# Altium PCB Igloo_FPGA_SSB_WiFi_v1.0.PcbDoc
Units mil, origin at the board's own origin, x right, y up, seen from the top; angles counter-clockwise.
Board outline 2000 x 1500 mil, 4 copper layers (Top Layer, GND Plane, Power Plane, Bottom Layer), stack 58.7 mil thick; 101 components, 86 nets, 411 pads, 228 vias.
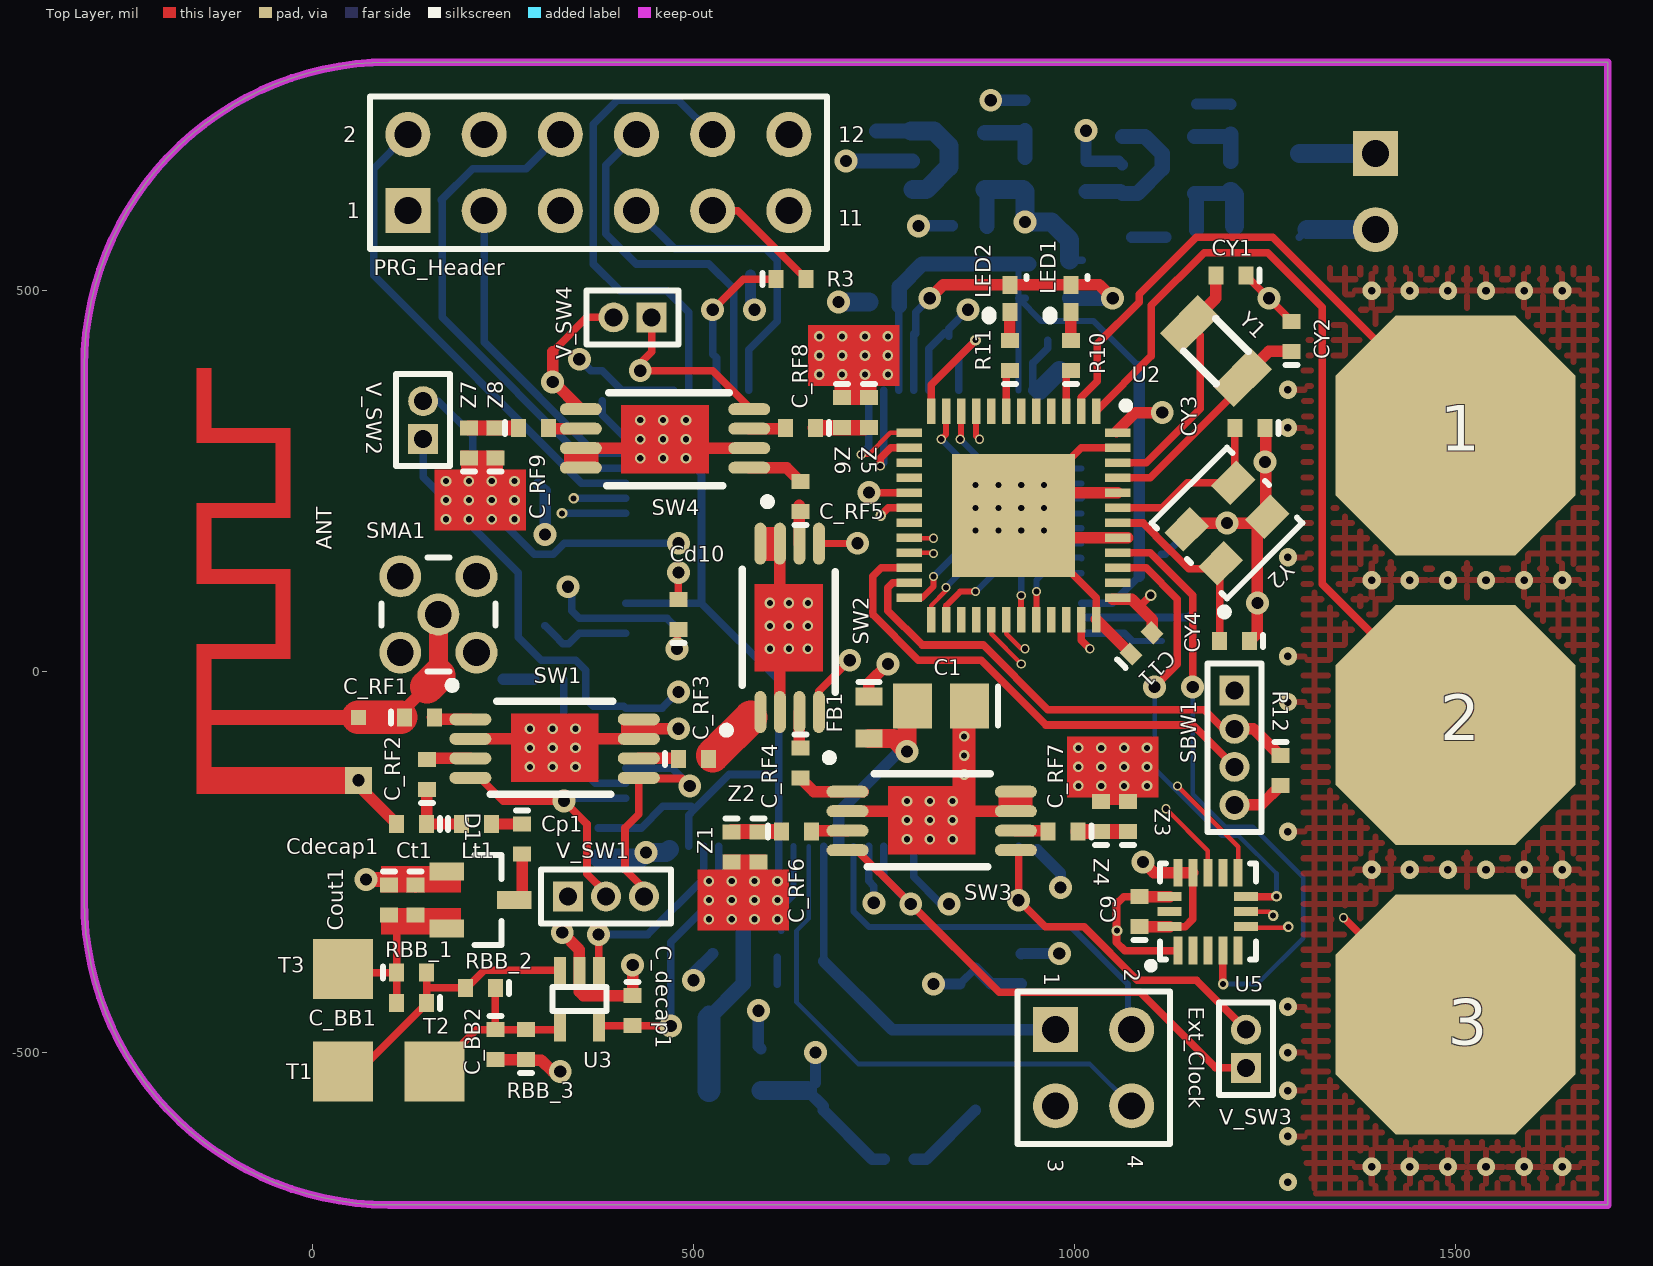
[diagram p0: Top Layer view]
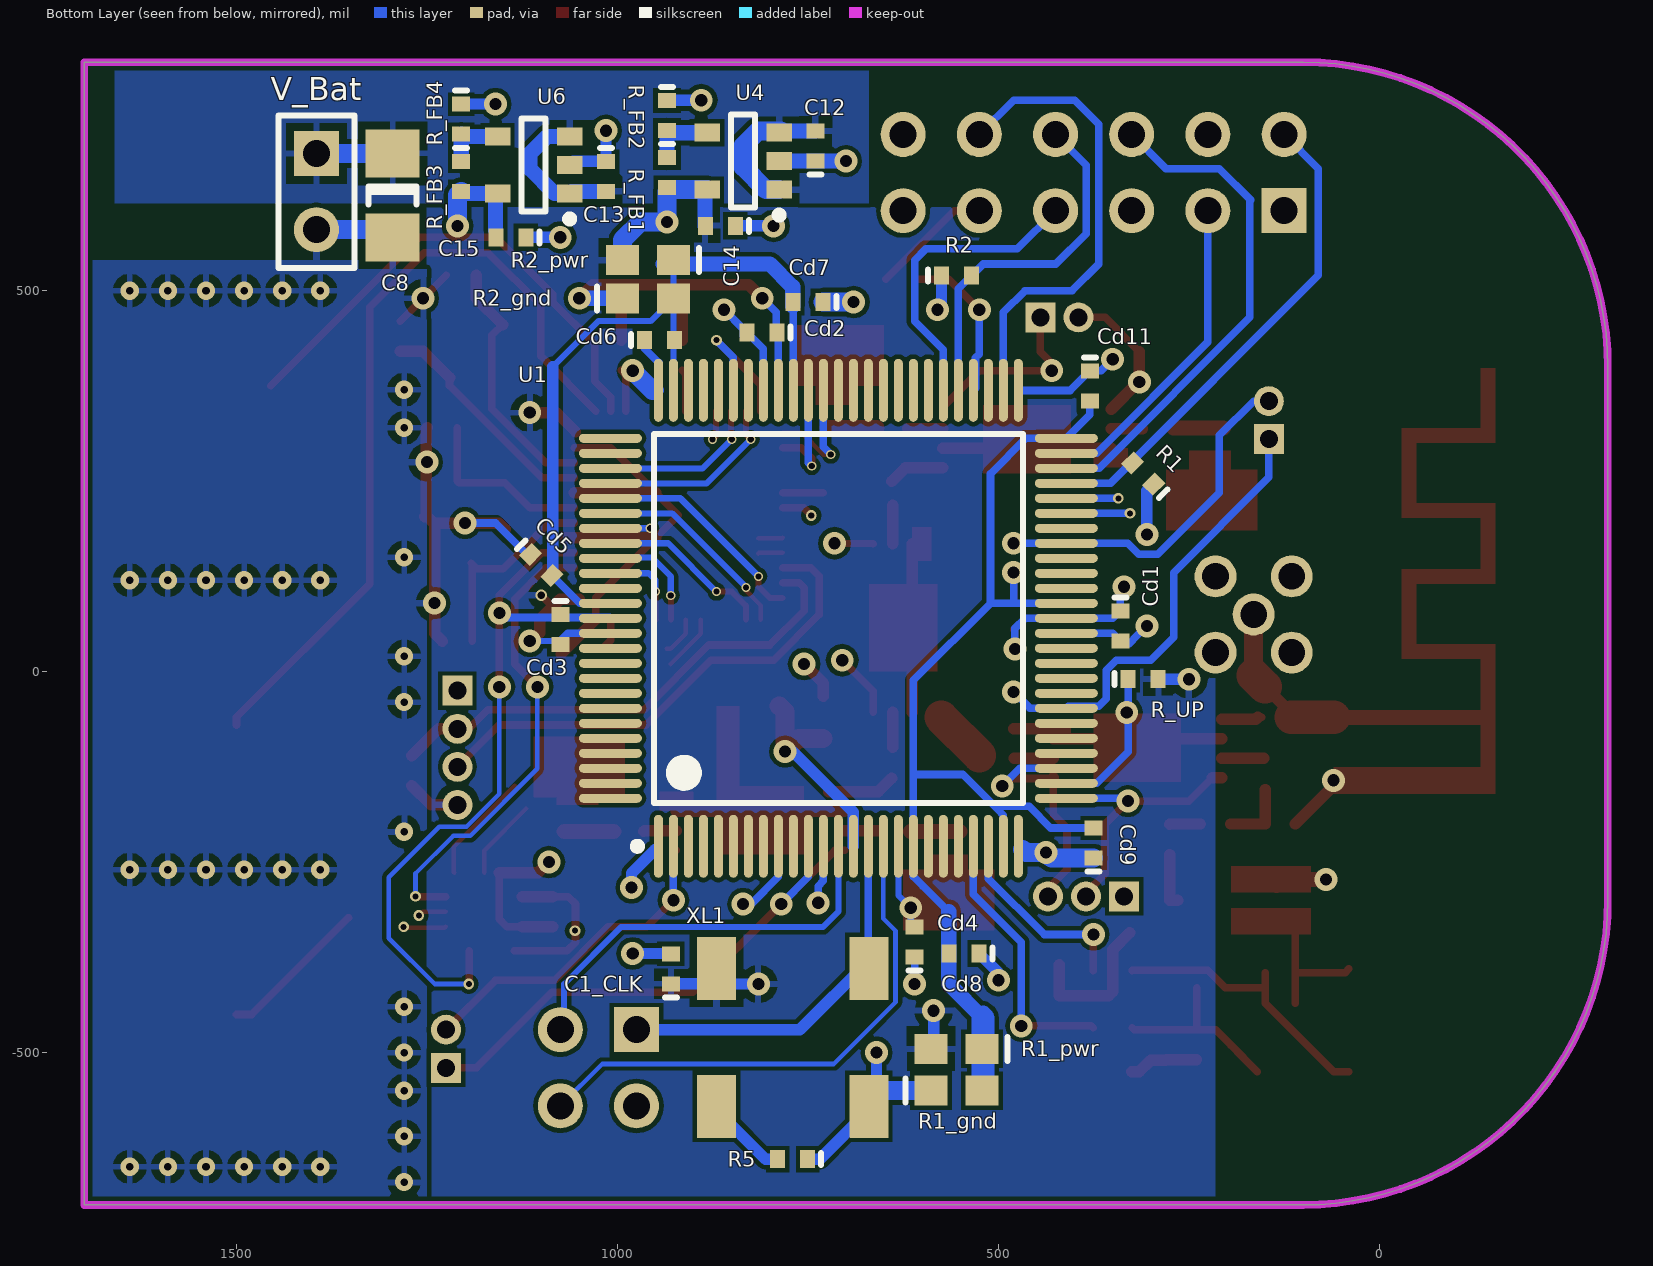
[diagram p1: Bottom Layer view, seen from below]
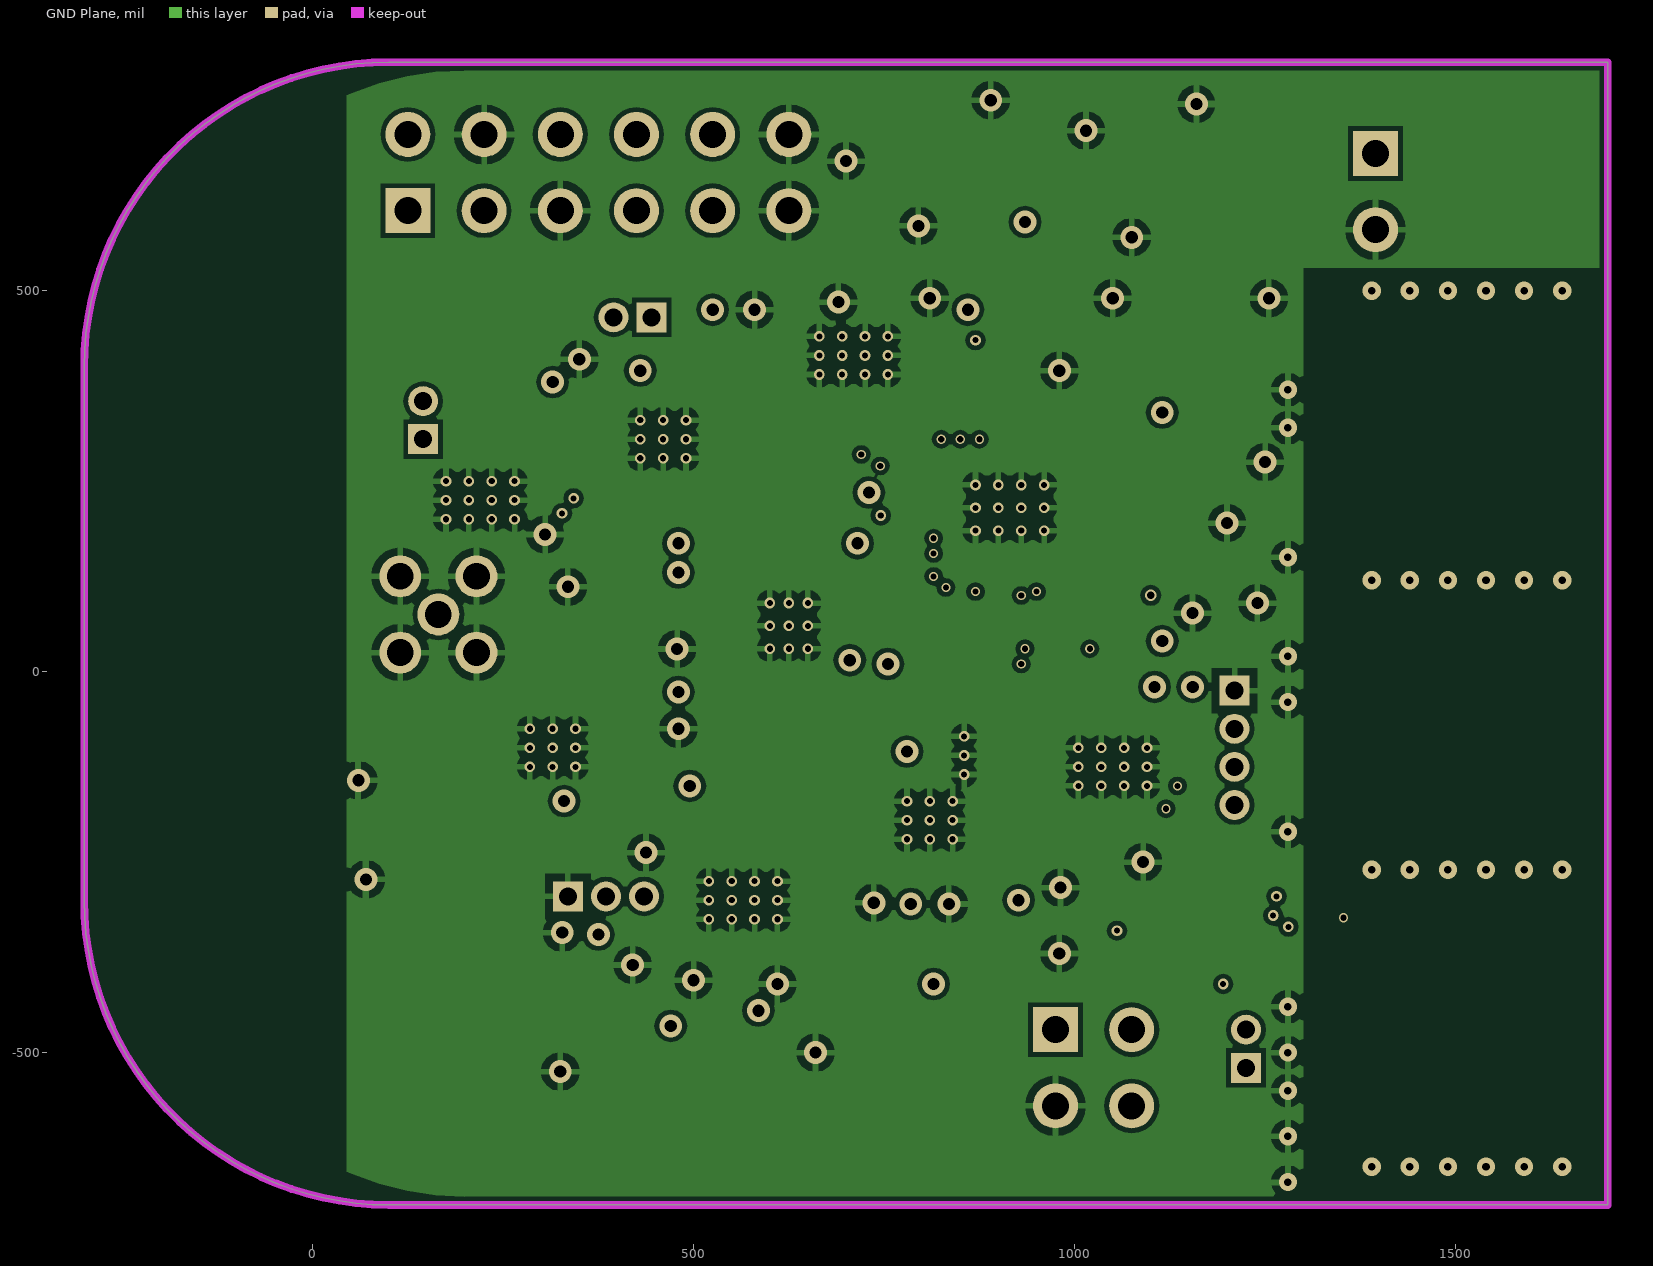
[diagram p2: GND Plane]
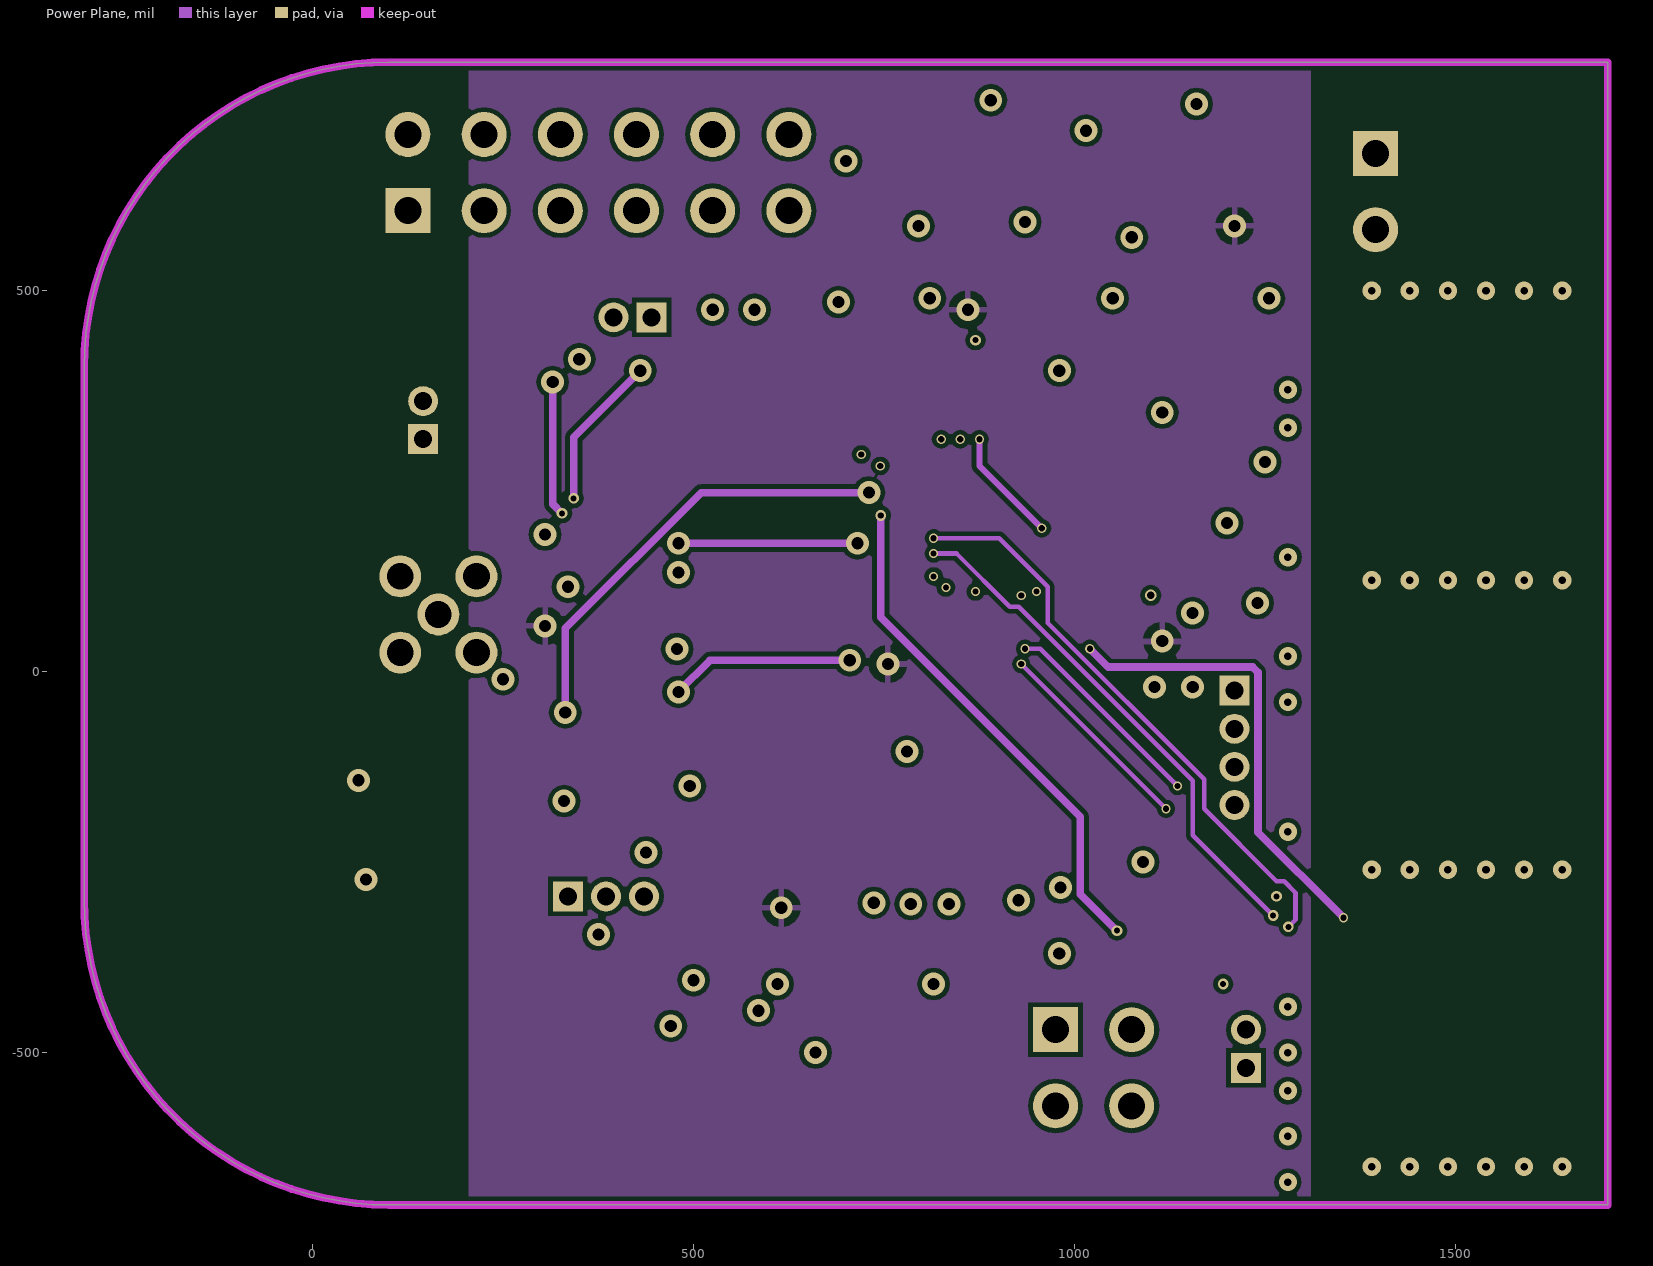
[diagram p3: Power Plane]

## Layer stack, top to bottom
Top Layer: signal copper 0.7
Dielectric: core 20, Rodgers 4350, Dk 3.48
GND Plane: signal copper 1.4
Dielectric: prepreg 14.5, Rodgers 4350, Dk 3.52
Power Plane: signal copper 1.4
Dielectric: core 20, Rodgers 4350, Dk 3.48
Bottom Layer: signal copper 0.7

## Board outline
100,-700 cw(c100,-300) -300,-300 -300,400 cw(c100,400) 100,800 1700,800 1700,-700

## Design rules (kind name [scope] priority, off if disabled: settings)
Clearance Clearance~Sierra [All] p1: gap=6 // Sunstone Circuits Minimum Clearance Rule (MLB~4&6 Layer Designs)
HoleSize "HoleSize~Sierra Circuits" [All] p1: absolutevalues=TRUE maxlimit=251 minlimit=6 maxpercent=80.000 minpercent=20.000 // Sunstone Circuits Hole Size Rule (MLB~4&6 Layer Designs)
HoleSize Testpoint [All] p2: absolutevalues=TRUE maxlimit=100 minlimit=1 maxpercent=80.000 minpercent=20.000
HoleSize TestPointUsage [All] p3: absolutevalues=TRUE maxlimit=100 minlimit=1 maxpercent=80.000 minpercent=20.000
HoleToHoleClearance [All] p1: gap=6 allowstackedmicrovias=TRUE
MinimumAnnularRing "MinimumAnnularRing~Sierra Circuits" [All] p1: minimumring=2 // Sunstone Circuits Minimum Annular Ring (MLB~4&6 Layer Designs)
MinimumSolderMaskSliver [All] p1: minsoldermaskwidth=4
PlaneClearance "PlaneClearance~Sunstone Circuits" [All] p1: clearance=12 // Sunstone Circuits Power Plane Clearance Rule (MLB~4&6 Layer Designs)
PlaneConnect "PlaneConnect~Sunstone Circuits" [All] p1: planeconnectstyle=Relief reliefexpansion=10 reliefentries=4 reliefconductorwidth=8 reliefairgap=10 // Sunstone Circuits Power Plane Connect Rule (MLB~4&6 Layer Designs)
PolygonConnect "PolygonConnect~Sunstone Circuits" [All] p1: connectstyle=Relief reliefconductorwidth=8 reliefentries=4 polygonreliefangle="90 Angle" airgapwidth=10 // Sunstone Circuits Polygon Connect Style (MLB~4&6 Layer Designs)
RoutingVias "RoutingVias~Sierra Circuits" [All] p1: holewidth=16 width=30 viastyle="Through Hole" minholewidth=6 minwidth=10 maxholewidth=20 maxwidth=40 // Sunstone Circuits Routing Vias Rule (MLB~4&6 Layer Designs)
ShortCircuit "ShortCircuit~Sunstone Circuits" [All] p1: allowed=FALSE // Sunstone Circuits Short Circuit Rule~Do Not Allow (MLB~4&6 Layer Designs)
SilkToSilkClearance [All] p1: silktosilkclearance=4
SilkToSolderMaskClearance [IsPad] p1: minsilkscreentomaskgap=4 clearancetoexposedcopper=TRUE
SolderMaskExpansion "SolderMaskExpansion~Sunstone Circuits" [All] p1: expansion=3 // Sunstone Circuits Solder Mask Expansion Rule (MLB~4&6 Layer Designs)
ViasUnderSMD "ViasUnderSMD~Sunstone Circuits" [All] p1: allowed=FALSE // Sunstone Circuits Vias Under SMD~Do Not Allow (MLB~4&6 Layer Designs)
Width "Width~Sierra Circuits" [All] p1: maxlimit=100 minlimit=6 preferedwidth=10 // Sunstone Circuits Minimum Width Rule (MLB~4&6 Layer Designs)
20 further rules are at their usual default settings.

## Classes and differential pairs
component class Top_sheet_Igloo_FPGA_SSB_WiFi_v1.0: C8 C12 C13 C14 C15 R_FB1 R_FB2 R_FB3 R_FB4 R_UP U4 U6 V_Bat
component class U_Sensors_Igloo_FPGA_SSB_WiFi_v1: C9 U5
component class U_RF_sheet_Igloo_FPGA_SSB_WiFi_v1: ANT C_BB1 C_BB2 C_decap1 C_RF1 C_RF2 C_RF3 C_RF4 C_RF5 C_RF6 C_RF7 C_RF8 C_RF9 Cdecap1 Cout1 Cp1 Ct1 D1 Lt1 RBB_1 RBB_2 RBB_3 SMA1 SW1 SW2 SW3 SW4 T1 T2 T3 U3 V_SW1 V_SW2 V_SW3 V_SW4 VIN1 Z1 Z2 Z3 Z4 Z5 Z6 Z7 Z8
component class U_FPGA_sheet_Igloo_FPGA_SSB_WiFi_v1: C1 C1_CLK Cd1 Cd2 Cd3 Cd4 Cd5 Cd6 Cd7 Cd8 Cd9 Cd10 Cd11 Ext_Clock FB1 PRG_Header R1 R1_gnd R1_pwr R2 R2_gnd R2_pwr R3 R5 U1 XL1
component class U_MSP_sheet_Igloo_FPGA_SSB_WiFi_v1: 1 2 3 C11 CY1 CY2 CY3 CY4 LED1 LED2 MSP430 R10 R11 R12 SBW1 U2 Y1 Y2

## Components (designator, comment, footprint, x,y, rotation, side; value= is the part's Value field where it differs from the comment)
1 "Cap touch" CAPTOUCH-8mm#1 1480,310 r90 top
2 "Cap touch" CAPTOUCH-8mm#2 1950,-60 r90 top
3 "Cap touch" CAPTOUCH-8mm#3 1480,-430 r90 top
ANT "ant_PIFA_2.4GHZ" ANT_PIFA_2.4GHz 60,-60 r90 top net-tie
C1 "Cap" 0805-W 825,-45 r180 top
C1_CLK "Cap" 0402 930,-390 r90 bottom
C8 "Cap" 1206-W 1295,625 r270 bottom
C9 "Cap" 0402 1085,-315 r90 top
C11 "Cdecap_MSP" 0402 1087.93,37.07 r45 top
C12 "Cdecap_MSP" 0402 740,690 r90 bottom
C13 "Cdecap_MSP" 0402 1015,650 r270 bottom
C14 "Cdecap_MSP" 0402 865,585 r0 bottom
C15 "Cdecap_MSP" 0402 1140,570 r0 bottom
C_BB1 "Cap" 0402 130,-435 r180 top
C_BB2 "Cap" 0402 240,-489.68 r270 top
C_decap1 "Cap" 0402 420,-445 r270 top
C_RF1 "Cap" 0402 140,-60 r0 top
C_RF2 "Cap" 0402 150,-135 r90 top
C_RF3 "Cap" 0402 500,-115 r0 top
C_RF4 "Cap" 0402 640,-120 r270 top
C_RF5 "Cap" 0402 640,230 r90 top
C_RF6 "Cap" 0402 635,-210 r0 top
C_RF7 "Cap" 0402 985,-210 r180 top
C_RF8 "Cap" 0402 640,320 r180 top
C_RF9 "Cap" 0402 290,320 r0 top
Cd1 "Cdecap_MSP" 0402 340,60 r270 bottom
Cd2 "Cdecap_MSP" 0402 810,445 r0 bottom
Cd3 "Cdecap_MSP" 0402 1075,55 r270 bottom
Cd4 "Cdecap_MSP" 0402 610,-355 r90 bottom
Cd5 "Cdecap_MSP" 0402 1100,140 r225 bottom
Cd6 "Cdecap_MSP" 0402 945,435 r180 bottom
Cd7 "Cdecap_MSP" 0402 750,485 r0 bottom
Cd8 "Cdecap_MSP" 0402 545,-370 r0 bottom
Cd9 "Cdecap_MSP" 0402 375,-225 r90 bottom
Cd10 "Cdecap_MSP" 0402 480,75 r90 top
Cd11 "Cdecap_MSP" 0402 380,375 r270 bottom
Cdecap1 "Cap" 0402 100,-300 r270 top
Cout1 "Cap" 0402 135,-300 r270 top
Cp1 "Cap" 0402 275,-220 r270 top
Ct1 "C_Ant_tune" 0402 130,-200 r180 top
CY1 "C_crystal" 0402 1205,520 r180 top
CY2 "C_crystal" 0402 1285,440 r90 top
CY3 "Cap" 0402 1230,320 r180 top
CY4 "Cap" 0402 1210,40 r180 top
D1 "SMS7630-005" "SOT23 - N" 220,-300 r0 top
Ext_Clock "Clock Port" HDR2X2 975,-470 r270 top
FB1 "Ferrite Bead" 0603 730,-60 r270 top
LED1 "LED" "Diode - 0402" 995,490 r270 top
LED2 "LED" "Diode - 0402" 915,490 r270 top
Lt1 "L_Ant_tune" 0402 215,-200 r0 top
PRG_Header "LCPS Header" HDR2X6 125,605 r0 top
R1 "Res" 0402 310,260 r45 bottom
R1_gnd "Res" 0603-W 555,-550 r180 bottom
R1_pwr "Res" 0603-W 555,-495 r0 bottom
R2 "Res" 0402 555,520 r180 bottom
R2_gnd "Res" 0603-W 960,490 r180 bottom
R2_pwr "Res" 0603-W 960,540 r0 bottom
R3 "Res" 0402 628.03,515 r0 top
R5 "Res" 0402 770,-640 r0 bottom
R10 "Res_LED" 0402 995,415 r90 top
R11 "Res_LED" 0402 915,415 r90 top
R12 "Res_HSS" 0402 1270,-130 r270 top
R_FB1 "Res" 0402 935,655 r270 bottom
R_FB2 "Res" 0402 935,730 r270 bottom
R_FB3 "Res" 0402 1205,650 r270 bottom
R_FB4 "Res" 0402 1205,725 r270 bottom
R_UP "Res" 0402 310,-10 r180 bottom
RBB_1 "Res" 0402 130,-395 r0 top
RBB_2 "Res" 0402 220,-415 r180 top
RBB_3 "Res" 0402 280,-489.68 r90 top
SBW1 "MHDR1X4-angled" MHDR1X4 1210,-25 r270 top
SMA1 "SMA - Hole - 5 Pin" CON-MMCX 165,75 r90 top
SW1 "HMC190BMS8" MSOP_8pin 320,-100 r0 top
SW2 "HMC190BMS8" MSOP_8pin 625,60 r90 top
SW3 "HMC190BMS8" MSOP_8pin 815,-195 r0 top
SW4 "HMC190BMS8" MSOP_8pin 460,305 r180 top
T1 "Test Point SMT" SMT_TESTPOINT_2MM 40,-525 r0 top
T2 "Test Point SMT" SMT_TESTPOINT_2MM 160,-525 r0 top
T3 "Test Point SMT" SMT_TESTPOINT_2MM 40,-390 r0 top
U1 "AGLN060V5-ZVQG100I" VQ100_M 710,70 r90 bottom
U2 "MSP430 Wolverine 48-Pin" MSP_QFN48_RGZ_PAD0 920,205 r270 top
U3 "Comparator" SC70-5 350,-430 r180 top
U4 "TPS78001DDCR" TI-DDC5_L 835,670 r0 bottom
U5 "ADXL362" ADXL362 1175,-315 r90 top
U6 "TPS78001DDCR" TI-DDC5_L 1110,665 r0 bottom
V_Bat "Battery Connector" HDR1X2 1395,680 r270 bottom
V_SW1 "MHDR1X3" MHDR1X3 335,-295 r0 top
V_SW2 "MHDR1X2" MHDR1X2 145,305 r90 top
V_SW3 "MHDR1X2" MHDR1X2 1225,-520 r90 top
V_SW4 "MHDR1X2" MHDR1X2 445,465 r180 top
XL1 "Oscillator" SG-636 770,-480 r180 bottom
Y1 "XTAL" "XTAL [3.20mm x 1.50mm]" 1185.56,420.66 r135 top
Y2 "XTAL" "XTAL 2.5MM X 3.2MM" 1200,195 r45 top
Z1 "Cap" 0402 550,-230 r270 top
Z2 "Cap" 0402 585,-230 r270 top
Z3 "Cap" 0402 1070,-190 r90 top
Z4 "Cap" 0402 1035,-190 r90 top
Z5 "Cap" 0402 730,340 r270 top
Z6 "Cap" 0402 695,340 r270 top
Z7 "Cap" 0402 205,300 r90 top
Z8 "Cap" 0402 240,300 r90 top

## Footprints (in the part's own frame and the unit in brackets; to place one, negate y for a bottom-side part, rotate by r counter-clockwise, add the part's x,y. Pads: shape width x height; smd on the part's side, far side on the other; paste and mask are expansions set on the pad)
0402 [mm] "Surface Mount; Body 1 x 0.5 mm (LxW typ)"
  rect 0.5x0.6 smd: 1(-0.5,0) 2(0.5,0)
  silkscreen extent -0.95,-0.2 -0.95,0.2, body extent -0.5,-0.25 0.5,0.25, height 0.5
0603 [mm] "Surface Mount; Body 1.6 x 0.8 mm (LxW typ)"
  rect 0.6x0.9 smd: 1(-0.7,0) 2(0.7,0)
  silkscreen extent -1.17,-0.35 -1.17,0.35, body extent -0.8,-0.4 0.8,0.4, height 0.8
0603-W [mm] "Surface Mount - Wide; Body 1.6 x 0.8 mm (LxW typ)"
  rect 1.1x1 smd: 1(-0.85,0) 2(0.85,0)
  silkscreen extent -1.7,-0.4 -1.7,0.4, body extent -0.8,-0.4 0.8,0.4, height 0.8
0805-W [mm] "Surface Mount - Wide; Body 2.0 x 1.25 mm (LxW typ)"
  rect 1.3x1.5 smd: 1(-0.95,0) 2(0.95,0)
  silkscreen extent -1.9,-0.65 -1.9,0.65, body extent -1,-0.62 1,0.63, height 1.25
1206-W [mm] "Surface Mount - Wide; Body 3.2 x 1.6 mm (LxW typ)"
  rect 1.6x1.8 smd: 1(-1.4,0) 2(1.4,0)
  silkscreen extent -0.3,-0.8 0.3,0.8, body extent -1.6,-0.8 1.6,0.8, height 1.1
ADXL362 [mm]
  rect 0.925x0.3 smd: 1(-1.3,1) 2(-1.3,0.5) 3(-1.3,0) 4(-1.3,-0.5) 5(-1.3,-1) 9(1.3,-1) 10(1.3,-0.5) 11(1.3,0) 12(1.3,0.5) 13(1.3,1)
  rect 0.3x0.8 smd: 6(-0.5,-1.275) 7(0,-1.275) 8(0.5,-1.275) 14(0.5,1.275) 15(0,1.275) 16(-0.5,1.275)
  silkscreen extent -1.9,-1.6 1.6,2, body extent -1.5,-1.5 1.5,1.5, height 1.14
ANT_PIFA_2.4GHz [mm] "2.4 ghz pifa antenna designed in HFSS"
  rect 0.5x0.5 smd: 1(0,0)
  rect 0.9x0.9 smd: 2(-2.1,0)
  Top Layer region: 9.15,4.9 11.65,4.9 11.65,5.4 9.15,5.4
  Top Layer region: 9.14,2.26 9.64,2.26 9.64,5.2 9.14,5.2
  Top Layer region: 6.89,2.26 9.39,2.26 9.39,2.76 6.89,2.76
  Top Layer region: 6.65,2.26 7.15,2.26 7.15,5.1 6.65,5.1
  Top Layer region: 4.44,4.9 7.14,4.9 7.14,5.4 4.44,5.4
  Top Layer region: 4.45,2.26 4.95,2.26 4.95,5.1 4.45,5.1
  Top Layer region: 2.2,2.27 4.7,2.27 4.7,2.77 2.2,2.77
  Top Layer region: 1.94,2.26 2.44,2.26 2.44,5.2 1.94,5.2
  Top Layer region: -2.56,4.9 2.44,4.9 2.44,5.4 -2.56,5.4
  Top Layer region: -2.55,0 -1.65,0 -1.65,5.2 -2.55,5.2
  Top Layer region: -0.25,0 0.25,0 0.25,5.1 -0.25,5.1
CAPTOUCH-8mm#1 [mil]
  oct 315x315 smd: 1(0,-20)
CAPTOUCH-8mm#2 [mil]
  oct 315x315 smd: 1(-10,450)
CAPTOUCH-8mm#3 [mil]
  oct 315x315 smd: 1(-20,-20)
CON-MMCX [mil] "Connector, MMCX Female, 5-Lead, Thru-Hole, Straight, Body 3.5x3.5mm"
  round 55 hole 35: 1(0,0) 2(-50,-50) 2(-50,50) 2(50,-50) 2(50,50)
  silkscreen extent -75,-75 75,75, body extent -73,-73 73,73, height 232
"Diode - 0402" [mm] "Diode: Body 1.6 x 0.8 mm (LxW typ)"
  rect 0.6x0.5 smd: 1(0.45,0) 2(-0.45,0)
  silkscreen extent -0.75,-0.7 0.63,0.55
HDR1X2 [mm] "Connector; Header; 2 Position"
  rect 1.5x1.5 hole 0.9: 1(0,0)
  round 1.5 hole 0.9: 2(2.54,0)
  silkscreen extent -1.27,-1.27 3.81,1.27
HDR2X2 [mm] "Connector; Header; 2x2 Position"
  rect 1.5x1.5 hole 0.9: 1(0,0)
  round 1.5 hole 0.9: 2(0,2.54) 3(2.54,0) 4(2.54,2.54)
  silkscreen extent -1.27,-1.27 3.81,3.81
HDR2X6 [mm] "Connector; Header; 6x2 Position"
  rect 1.5x1.5 hole 0.9: 1(0,0)
  round 1.5 hole 0.9: 2(0,2.54) 3(2.54,0) 4(2.54,2.54) 5(5.08,0) 6(5.08,2.54) 7(7.62,0) 8(7.62,2.54) 9(10.16,0) 10(10.16,2.54) 11(12.7,0) 12(12.7,2.54)
  silkscreen extent -1.27,-1.27 13.97,3.81
MHDR1X2 [mm] "Connector; Header; 2 Position"
  rect 1x1 hole 0.6: 1(0,0)
  round 1 hole 0.6: 2(1.27,0)
  silkscreen extent -0.9,-0.9 2.17,0.9
MHDR1X3 [mm] "Connector; Header; 3 Position"
  rect 1x1 hole 0.6: 1(0,0)
  round 1 hole 0.6: 2(1.27,0) 3(2.54,0)
  silkscreen extent -0.9,-0.9 3.44,0.9
MHDR1X4 [mm] "Connector; Header; 4 Position"
  rect 1x1 hole 0.6: 1(0,0)
  round 1 hole 0.6: 2(1.27,0) 3(2.54,0) 4(3.81,0)
  silkscreen extent -0.9,-0.9 4.71,0.9
MSOP_8pin [mm]
  oval 1.4x0.4 smd: 1(-2.872,0.95) 2(-2.872,0.3) 3(-2.872,-0.35) 4(-2.87,-1.001) 5(2.745,-1) 6(2.745,-0.35) 7(2.745,0.3) 8(2.745,0.95)
  silkscreen extent -3.6,-1.55 1.88,2.21
MSP_QFN48_RGZ_PAD0 [mm]
  rect 4.1x4.1 smd: 0(0,0)
  rect 0.85x0.28 smd: 1(-3.475,2.75) 2(-3.475,2.25) 3(-3.475,1.75) 4(-3.475,1.25) 5(-3.475,0.75) 6(-3.475,0.25) 7(-3.475,-0.25) 8(-3.475,-0.75) 9(-3.475,-1.25) 10(-3.475,-1.75) 11(-3.475,-2.25) 12(-3.475,-2.75) 25(3.475,-2.75) 26(3.475,-2.25) 27(3.475,-1.75) 28(3.475,-1.25) 29(3.475,-0.75) 30(3.475,-0.25) 31(3.475,0.25) 32(3.475,0.75) 33(3.475,1.25) 34(3.475,1.75) 35(3.475,2.25) 36(3.475,2.75)
  rect 0.28x0.85 smd: 13(-2.75,-3.475) 14(-2.25,-3.475) 15(-1.75,-3.475) 16(-1.25,-3.475) 17(-0.75,-3.475) 18(-0.25,-3.475) 19(0.25,-3.475) 20(0.75,-3.475) 21(1.25,-3.475) 22(1.75,-3.475) 23(2.25,-3.475) 24(2.75,-3.475) 37(2.75,3.475) 38(2.25,3.475) 39(1.75,3.475) 40(1.25,3.475) 41(0.75,3.475) 42(0.25,3.475) 43(-0.25,3.475) 44(-0.75,3.475) 45(-1.25,3.475) 46(-1.75,3.475) 47(-2.25,3.475) 48(-2.75,3.475)
  silkscreen extent -3.78,3.63 -3.55,3.85, body extent -3.3,-3.3 3.3,3.3, height 1
SC70-5 [mm] "SC70-5"
  rect 0.4x0.92 smd: 1(-0.65,-0.95) 2(0,-0.95) 3(0.65,-0.95) 4(0.65,0.95) 5(-0.65,0.95)
  silkscreen extent -0.9,-0.4 0.9,0.4
SG-636 [mm] "Clock Oscillator 55 MHz"
  rect 1.3x2.1 smd: 1(-2.54,-2.3) 2(2.54,-2.3) 3(2.54,2.3) 4(-2.54,2.3)
SMT_TESTPOINT_2MM [mm]
  rect 2x2 smd: 1(0,0)
"SOT23 - N" [mm] "SOT23, 3-Leads, Body 2.9x1.3mm, Pitch 0.95mm, Lead Span 2.3mm - Reverse Pinning, IPC Medium Density"
  rect 1.15x0.6 smd: 1(-1.125,0.95) 2(-1.125,-0.95) 3(1.125,0)
  silkscreen extent -0.2,-1.5 0.7,1.5, body extent -0.7,-1.5 0.7,1.5, height 1.1
TI-DDC5_L [mm] "SOT23, 5-Leads, Body 2.9x1.6mm, Pitch 0.95mm, IPC High Density"
  rect 0.85x0.6 smd: 1(-1.2,0.95) 2(-1.2,0) 3(-1.2,-0.95) 4(1.2,-0.95) 5(1.2,0.95)
  silkscreen extent -1.32,-1.55 0.4,1.92, body extent -0.87,-1.52 0.87,1.53, height 1.1
VQ100_M [mm] "Thin QFP, 100-Leads, Body 14x14mm, Pitch 0.5mm, IPC Low Density"
  oval 2.1x0.3 smd: 1(-7.6,6) 2(-7.6,5.5) 3(-7.6,5) 4(-7.6,4.5) 5(-7.6,4) 6(-7.6,3.5) 7(-7.6,3) 8(-7.6,2.5) 9(-7.6,2) 10(-7.6,1.5) 11(-7.6,1) 12(-7.6,0.5) 13(-7.6,0) 14(-7.6,-0.5) 15(-7.6,-1) 16(-7.6,-1.5) 17(-7.6,-2) 18(-7.6,-2.5) 19(-7.6,-3) 20(-7.6,-3.5) 21(-7.6,-4) 22(-7.6,-4.5) 23(-7.6,-5) 24(-7.6,-5.5) 25(-7.6,-6) 51(7.6,-6) 52(7.6,-5.5) 53(7.6,-5) 54(7.6,-4.5) 55(7.6,-4) 56(7.6,-3.5) 57(7.6,-3) 58(7.6,-2.5) 59(7.6,-2) 60(7.6,-1.5) 61(7.6,-1) 62(7.6,-0.5) 63(7.6,0) 64(7.6,0.5) 65(7.6,1) 66(7.6,1.5) 67(7.6,2) 68(7.6,2.5) 69(7.6,3) 70(7.6,3.5) 71(7.6,4) 72(7.6,4.5) 73(7.6,5) 74(7.6,5.5) 75(7.6,6)
  oval 0.3x2.1 smd: 26(-6,-7.6) 27(-5.5,-7.6) 28(-5,-7.6) 29(-4.5,-7.6) 30(-4,-7.6) 31(-3.5,-7.6) 32(-3,-7.6) 33(-2.5,-7.6) 34(-2,-7.6) 35(-1.5,-7.6) 36(-1,-7.6) 37(-0.5,-7.6) 38(0,-7.6) 39(0.5,-7.6) 40(1,-7.6) 41(1.5,-7.6) 42(2,-7.6) 43(2.5,-7.6) 44(3,-7.6) 45(3.5,-7.6) 46(4,-7.6) 47(4.5,-7.6) 48(5,-7.6) 49(5.5,-7.6) 50(6,-7.6) 76(6,7.6) 77(5.5,7.6) 78(5,7.6) 79(4.5,7.6) 80(4,7.6) 81(3.5,7.6) 82(3,7.6) 83(2.5,7.6) 84(2,7.6) 85(1.5,7.6) 86(1,7.6) 87(0.5,7.6) 88(0,7.6) 89(-0.5,7.6) 90(-1,7.6) 91(-1.5,7.6) 92(-2,7.6) 93(-2.5,7.6) 94(-3,7.6) 95(-3.5,7.6) 96(-4,7.6) 97(-4.5,7.6) 98(-5,7.6) 99(-5.5,7.6) 100(-6,7.6)
  silkscreen extent -7.72,-6.15 6.15,6.83, body extent -7,-7 7,7, height 1.6
"XTAL 2.5MM X 3.2MM" [mm]
  rect 1.2x0.9 smd: 1(-1.1,-0.8) 2(1.1,-0.8) 3(1.1,0.8) 4(-1.1,0.8)
  silkscreen extent -2.28,-2.16 1.89,1.78
"XTAL [3.20mm x 1.50mm]" [mm] "FC-135   crystal - epson eletronics"
  rect 1x1.8 smd: 1(-1.25,0) 2(1.25,0)
  silkscreen extent -0.76,-0.76 0.76,0.76

## Part data
1 2 3: "Cap Touch Buttons"
C1 C8 C9 C_BB1 C_BB2 C_decap1 C_RF1 C_RF2 C_RF3 C_RF4 C_RF5 C_RF6 C_RF7 C_RF8 C_RF9 CY3 CY4 Z1 Z2 Z3 Z4 Z5 Z6 Z7 Z8: "Ceramic Capacitor (Surface Mount)"
C1_CLK: "Decap Ceramic Capacitor (Surface Mount)"
C11 C12 C13 C14 C15 Cd1 Cd2 Cd3 Cd4 Cd5 Cd6 Cd7 Cd8 Cd9 Cd10 Cd11 Ct1 CY1 CY2: library part Cap, "Ceramic Capacitor (Surface Mount)"
Cdecap1 Cout1 Cp1: "CAP CER 5.6PF 50V NP0 0402"
D1: "Agilent Schottky Diode, Two in Series, Small Package SOT-323"
Ext_Clock: library part "Header 2X2", "Header, 2-Pin, Dual row"
FB1: "Ferrite bead, RF choke"
LED1: library part "Diode - picoLED", "Green LED"
LED2: library part "Diode - picoLED", "RED LED"
Lt1: library part Ind, "Inductor (Surface Mount)"
PRG_Header: library part "Header 6X2", "Header, 6-Pin, Dual row"
R1 R1_gnd R1_pwr R2 R2_gnd R2_pwr R3 R_FB1 R_FB2 R_FB3 R_FB4 R_UP RBB_1 RBB_2 RBB_3: "Chip Resistor (Surface Mount)"
R5: "Jumper to disable"
R10 R11 R12: library part Res, "Chip Resistor (Surface Mount)"
SBW1: library part MHDR1X4, "Header, 4-Pin"
SMA1: "SMA - Through Hole Connector"
SW1 SW2 SW3 SW4: "RF 2:1 MUX/SPDT Reflective"
T1 T2 T3: "Test Point, Flat Pad"
U1: library part CMP-0101-00193-1, "IGLOO nano Low-Power Flash 1.5V FPGA with Flash*Freeze, 71 User IOs, 60K System Gates, 1Kbit Flash ROM, Z feature grade, 100-Pin TQFP, Industrial Grade, Pb-Free"
U2: library part MSP430FR596X_586X_RGZ, "16-bit FRAM MCU"
U3: library part NCS2200, "Comparator: On Semi 10uA Comparator"
U4 U6: library part CMP-0394-01123-1, "Single Output LDO, 150 mA, Adjustable 1.22 to 5.25 V Output, 2.2 to 5.5 V Input, with 500 nA Quiescent Current, 5-pin SOT (DDC), -40 to 125 degC, Green (RoHS & no Sb/Br)"
U5: "Analog Devices low power accelerometer"
V_Bat: library part "Header 2", "Header, 2-Pin"
V_SW1: "Header, 3-Pin"
V_SW2 V_SW3 V_SW4: "Header, 2-Pin"
XL1: library part SG-636, "Oscillator (55 MHz)"
Y1: library part "XTAL 2-pins", "Crystal - 2-Pin Surface Mount"
Y2: library part "HFXTAL 4pins_SMT", "Crystal Oscillator - Through Hole"

## Via types
v1: diameter 14, hole 8, Top Layer to GND Plane, tented top, 99 vias
v2: diameter 30, hole 16, Top Layer to Bottom Layer, 49 vias
v3: diameter 24, hole 10, Top Layer to Bottom Layer, tented both sides, 35 vias
v4: diameter 12, hole 8, Top Layer to Bottom Layer, 10 vias
v5: diameter 14, hole 8, Top Layer to Bottom Layer, 9 vias
v6: diameter 12, hole 8, Top Layer to Power Plane, 8 vias
v7: diameter 30, hole 16, GND Plane to Bottom Layer, 6 vias
v8: diameter 30, hole 16, Power Plane to Bottom Layer, 5 vias
v9: diameter 30, hole 16, Top Layer to GND Plane, 4 vias
v10: diameter 15, hole 10, Top Layer to Bottom Layer, 1 vias
v11: diameter 30, hole 16, Top Layer to Power Plane, 1 vias
v12: diameter 12, hole 8, Power Plane to Bottom Layer, 1 vias

## Nets (pads, with @x,y where several pads share a name; then routed paths per layer and width w, separated by ;. In a path a pad name is that pad's centre, name@x,y a point inside that pad or via, vN(x,y) a via of type N, cw(c..) or ccw(c..) an arc to the next point about the centre after c; other vN are vias at no path point)
AGL_TCK: PRG_Header.2 R1.2 U1.47 | length 647.4
  Bottom Layer w10: PRG_Header.2 80,660 80,520 352.83,247.17 U1.47
AGL_TDI: PRG_Header.6 U1.48 | length 668.1
  Bottom Layer w10: 169,619 210,660 280,660 PRG_Header.6 ; 170,619 170,465 367.87,267.13 U1.48@410.51,267.13
AGL_TDO: PRG_Header.9 R3.2 | length 163.8
  Top Layer w10: PRG_Header.9 557.72,605 R3.2
  Top Layer w15: PRG_Header.9 PRG_Header.9@527.72,602.28
AGL_TMS: PRG_Header.3 U1.49 | length 418.7
  Bottom Layer w10: PRG_Header.3 225,432.63 371.09,286.54 U1.49
AGL_TRST: PRG_Header.8 R2.2 U1.55 | length 478.1
  Bottom Layer w10: PRG_Header.8 384.47,664.47 384.47,575 424.47,535 520,535 552.52,502.48 U1.55
CLOCK_CNTRL: R5.2 XL1.1 | length 107
  Bottom Layer w15: R5.2 805.55,-640 XL1.1@870,-575.55
EXT_CLOCK: Ext_Clock.1 U1.15 XL1.3 | length 492.4
  Bottom Layer w10: XL1.3@670.63,-380 U1.15
  Bottom Layer w15: XL1.3@670.63,-380 760.63,-470 Ext_Clock.1
GND: ANT.2 C1.1 C1_CLK.2 C8.2 C9.1 C11.1 C12.1 C13.1 C14.1 C15.1 C_BB2.2 C_decap1.1 Cd1.1 Cd2.1 Cd3.1 Cd4.1 Cd5.1 Cd6.1 Cd7.1 Cd8.1 Cd9.1 Cd10.1 Cd11.1 Cdecap1.1 Cout1.1 Ct1.2 CY1.1 CY2.2 CY3.1 CY4.1 D1.1 Ext_Clock.3 LED1.2 LED2.2 PRG_Header.4 PRG_Header.5 PRG_Header.11 PRG_Header.12 R1.1 R1_gnd.1 R2.1 R2_gnd.1 R5.1 R_FB2.1 R_FB4.1 RBB_3.1 SBW1.1 SMA1.2 SW1.2 SW1.7 SW1.8 SW2.2 SW2.7 SW2.8 SW3.2 SW3.7 SW3.8 SW4.2 SW4.7 SW4.8 U1.1 U1.9 U1.12 U1.25 U1.38 U1.51 U1.67 U1.75 U1.88 U2.0 U2.36 U2.41 U2.44 U2.47 U3.2 U4.2 U5.12 U5.13 U5.16 U6.2 V_Bat.2 V_SW1.1 XL1.2 Y2.2 Y2.4 Z1.2 Z2.2 Z3.2 Z4.2 Z5.1 Z6.1 Z7.1 Z8.1 | length 5255
  Top Layer w10: v2(478.39,29.68) 478.39,53.7 Cd10.1 ; U2.36 1028.27,96.73 949.53,175.47 U2.0 1008.58,293.58 U2.47 ; U5.16 1145.32,-334.68 1155.31,-324.69 U5.12 ; CY1.1 CY2.2
  Top Layer w15: v2(60,-142.68) 60,-149.69 Ct1.2 ; SW1.2 SW1.7 ; C_BB2.2 RBB_3.1 280.63,-510 300,-510 315,-525 v9(325,-525) ; v9(327.5,-342.5) 350,-365 U3.2 350,-420 355.32,-425.32 C_decap1.1 v9(420,-385) ; SW4.7 SW4.2 ; 420,-75 v9(480,-75) ; SW2.2 SW2.7 ; SW3.2 SW3.7 ; v2(810,490) 827.72,507.72 LED2.2 LED1.2 1032.28,507.72 v2(1050,490) ; U2.0@949.53,175.47 U2.41@1070,175.47 ; U2.0@949.53,234.53 U2.44 ; U2.36@1028.62,68.54 C11.1 ; C9.1 U5.16 ; v2(1090,-250) 1103.82,-263.82 U5.13 U5.12 ; Y2.4 1155.46,195 v2(1200,195) 1240.92,195 Y2.2@1249.27,203.35 ; CY4.1 1240,50.32 1240,194.08 Y2.2@1249.27,203.35 ; CY3.1 1251.08,318.6 1251.08,205.16 Y2.2@1249.27,203.35 ; Y2.2 Y2.2@1249.27,203.35
  Top Layer w20: v2(70,-272.68) 127.36,-272.68 Cout1.1
  Bottom Layer w10: v2(335,111.3) 340,106.3 Cd1.1 349.68,70 U1.38 465,70 478.39,56.61 v2(478.39,29.68) ; v2(350,410) 365.32,394.68 Cd11.1 405.68,369 473.57,369 U1.51 ; v7(610,-410) Cd4.1 ; XL1.2@649.45,-550 XL1.2@660,-539.45 ; U1.12 729.68,-274.68 736.54,-281.54 v2(736.54,-303.46) ; U1.9 788.74,-269.37 824.38,-305 v2(835,-305) ; U1.67 788.74,443.43 Cd2.1 ; Cd2.1@791.54,443.78 791.54,471.54 v2(810,490) ; U1.75 945,370.43 945,405 964.68,424.68 Cd6.1 ; U1.88 1010.22,71.01 1148.99,71.01 v7(1154.78,76.81) ; v2(1050,490) v2@1050,495.32 ; Cd5.1 1118.92,153.92 1160,195 v2(1200,195) ; C8.2 C8.2@1305.12,580
  Bottom Layer w15: R1.1 305,237.16 v2(305,180) ; v2(500,-405) 500,-395.32 Cd8.1 ; R2.1 574.68,480.32 v2(580,475) ; XL1.2@649.45,-550 XL1.2 ; XL1.2@660,-539.45 v2(660,-500) ; XL1.2@670,-575.55 734.45,-640 R5.1 ; U4.2@787.44,670.32 U4.2 ; v2(795,585) C14.1@839.68,585 ; v2(890,750) R_FB2.1@934.68,750 ; C1_CLK.2 930.31,-370 v2(980,-370) ; U1.75 954.21,369.21 ; U1.1@951,-234 981.54,-264.53 v2(981.54,-283.46) ; v2(1015,710) C13.1 1058.07,669.68 U6.2 ; v7(1075,570) C15.1@1120,570 ; v7(1160,745) 1204.68,745 R_FB4.1
  Bottom Layer w20: v2(700,670) 700.32,670.32 C12.1 U4.2@787.44,670.32 ; R2_gnd.1 v2(1050,490)
  Bottom Layer w25: Cd9.1 430.32,-244.68 v2(437.5,-237.5) 464,-237.5 U1.25@468.14,-233.36 ; R1_gnd.1 XL1.2@649.45,-550 ; v2(690,485) Cd7.1 ; 954.21,369.21 v7(980,395) ; C8.2@1305.12,580 V_Bat.2
  other v1: 520,-325 550,-325 580,-325 610,-325 520,-300 550,-300 580,-300 610,-300 520,-275 550,-275 580,-275 610,-275 780,-220 810,-220 840,-220 780,-195 810,-195 840,-195 780,-170 810,-170 840,-170 1005,-150 1035,-150 1065,-150 1095,-150 855,-135 285,-125 315,-125 345,-125 1005,-125 1035,-125 1065,-125 1095,-125 855,-110 285,-100 315,-100 345,-100 1005,-100 1035,-100 1065,-100 1095,-100 855,-85 285,-75 315,-75 345,-75 600,30 625,30 650,30 600,60 625,60 650,60 600,90 625,90 650,90 870,185 900,185 930,185 960,185 175,200 205,200 235,200 265,200 870,215 900,215 930,215 960,215 175,225 205,225 235,225 265,225 870,245 900,245 930,245 960,245 175,250 205,250 235,250 265,250 430,280 460,280 490,280 430,305 460,305 490,305 430,330 460,330 490,330 665,390 695,390 725,390 755,390 665,415 695,415 725,415 755,415 665,440 695,440 725,440 755,440
  other v2: 1240,90 1250,275 1255,490
  other v3: 1280,-670 1390,-650 1440,-650 1490,-650 1540,-650 1590,-650 1640,-650 1280,-610 1280,-550 1280,-500 1280,-440 1390,-260 1440,-260 1490,-260 1540,-260 1590,-260 1640,-260 1280,-210 1280,-40 1280,20 1390,120 1440,120 1490,120 1540,120 1590,120 1640,120 1280,150 1280,320 1280,370 1390,500 1440,500 1490,500 1540,500 1590,500 1640,500
HFXTL1: CY3.2 U2.43 Y2.3 | length 238.2
  Top Layer w10: U2.43 1114.84,214.84 1147.89,247.89 Y2.3 1210.31,249.86 CY3.2
HFXTL2: CY4.2 U2.42 Y2.1 | length 263.6
  Top Layer w10: U2.42 1056.97,195 1090,195 1106.88,178.12 1106.88,177.92 1149.79,135 1184.54,135 Y2.1@1190.32,140.77 ; CY4.2 Y2.1@1190.32,140.77 ; Y2.1 Y2.1@1190.32,140.77
LED1: R10.1 U2.3 | length 56
  Top Layer w10: U2.3 988.9,389.21 R10.1
LED2: R11.1 U2.7 | length 55.5
  Top Layer w10: U2.7 910.16,390.47 R11.1
LFXTL1: CY1.2 U2.46 Y1.2 | length 332.9
  Top Layer w10: U2.46 1093.9,273.9 1165,345 1165,441.21 Y1.2
  Top Layer w15: Y1.2 1185.31,490.01 CY1.2
LFXTL2: CY2.1 U2.45 Y1.1 | length 303.1
  Top Layer w10: U2.45 1099.21,254.21 1220.36,375.36 Y1.1
  Top Layer w15: Y1.1 1254.81,420.32 CY2.1
MSP_ACLK: U1.65 U2.14 | length 154.8
  Top Layer w10: v4(745,270) 745,280 758.58,293.58 U2.14
  Bottom Layer w10: v4(745,270) 749.37,274.37 U1.65
MSP_MCLK: U1.64 U2.13 | length 163.4
  Top Layer w6: v4(720,285) 730,285 758.27,313.27 U2.13
  Bottom Layer w10: v4(720,285) 730,295 729.68,295.32 U1.64
MSP_SMCLK: U1.70 U2.12 | length 192.3
  Top Layer w10: U2.12 811.73,376.73 v5(870,435)
  Bottom Layer w10: U1.70 847.8,412.8 v5(870,435)
MSP_UCA0_CLK: U1.79 U2.11 | length 247.6
  Top Layer w8: v4(825,305) 831.42,311.42 U2.11
  Bottom Layer w8: v4(825,305) 882.83,247.17 U1.79
MSP_UCA0_SIMO: U1.80 U2.24 | length 287.9
  Top Layer w8: U2.24 799.89,96.73 815,111.84 v4(815,125)
  Bottom Layer w9: v4(815,125) 917.48,227.48 U1.80
MSP_UCA0_SOMI: U1.81 U2.25 | length 268.8
  Top Layer w6: U2.25 811.73,86.73 831.03,106.03 v4(831.03,110.49)
  Bottom Layer w8: v4(831.03,110.49) 928.34,207.8 U1.81
MSP_UCA0_STE: U1.78 U2.10 | length 212.3
  Top Layer w8: v4(850,305) 851.1,306.1 U2.10
  Bottom Layer w8: v4(850,305) 888.15,266.85 U1.78
MSP_UCA1_CLK: U2.40 U5.4 | length 826
  Top Layer w10: U2.40 1099.21,155.79 1155,100 v2(1155,-20) ; U5.4 1194.68,-409.68 v5(1195,-410)
  Bottom Layer w6: v2(1155,-20) 1155,-160.57 1198.12,-203.68 1233.68,-203.68 1300,-270 1300,-350 1240,-410 v5(1195,-410)
MSP_UCA1_STE: U2.39 U5.8 | length 617.1
  Top Layer w10: U2.39 1093.9,136.1 1135,95 1135,10 v2(1105,-20) ; U5.8 1264.68,-295.32 v5(1265,-295)
  Bottom Layer w6: v2(1105,-20) 1105,-127.54 1193.15,-215.68 1215.68,-215.68 1265,-265 v5(1265,-295)
MSP_UCB0_CLK: U1.83 U2.26 | length 230
  Top Layer w8: U2.26 831.42,86.42 850,105 v4(870,105)
  Bottom Layer w8: v4(870,105) 933.43,168.43 U1.83
MSP_UCB0_SIMO: U1.84 U2.31 | length 147.3
  Top Layer w8: U2.31 929.84,100.16 v4(930,100)
  Bottom Layer w8: v4(930,100) 930,125 955,150 1007.95,150 U1.84
MSP_UCB0_SOMI: U1.85 U2.32 | length 115
  Top Layer w8: U2.32 950,68.66 v4(950,105)
  Bottom Layer w8: v4(950,105) 950,120 959.06,129.06 U1.85
MSP_UCB0_STE: U1.82 U2.9 | length 241.7
  Top Layer w8: U2.9 870.79,309.21 v4(875,305)
  Power Plane w8: v4(875,305) 875,270 v12(956.89,188.11)
  Bottom Layer w8: v12(956.89,188.11) U1.82
NetC1_2: C1.2 FB1.2 U1.14 | length 287.6
  Top Layer w25: FB1.2 762.56,-87.56 v2(780,-105) 780,-52.6 C1.2
  Bottom Layer w15: U1.14 690.32,-184.68 770,-105 v2(780,-105)
NetC9_2: C9.2 U2.18 U5.1 U5.14 | length 924.1
  Top Layer w10: v5(745.62,205) 755.47,214.84 U2.18 ; C9.2 1064.69,-295.31 1055,-305 1055,-355 1066.18,-366.18 U5.1
  Top Layer w15: C9.2 U5.14
  Power Plane w10: v5(745.62,205) 745.62,71.38 1007.54,-190.54 1007.54,-291.91 v5(1055.62,-340)
NetC_BB1_1: C_BB1.1 RBB_1.2 RBB_2.2 T1.1 U3.3 | length 371.3
  Top Layer w10: T1.1 59.68,-525 C_BB1.1 149.69,-415 ; RBB_1.2 149.69,-415 ; U3.3 324,-392.19 225.29,-392.19 202.48,-415 RBB_2.2 149.69,-415
NetC_BB1_2: C_BB1.2 Cdecap1.2 Cout1.2 D1.2 RBB_1.1 T3.1 | length 192
  Top Layer w10: T3.1 45,-395 RBB_1.1 ; Cdecap1.2 110.31,-330 RBB_1.1 ; C_BB1.2 RBB_1.1
NetC_BB2_1: C_BB2.1 RBB_2.1 RBB_3.2 T2.1 U3.4 | length 292.9
  Top Layer w10: T2.1@195,-490 T2.1 215,-470 C_BB2.1 ; RBB_2.1 239.68,-469.68 C_BB2.1 ; U3.4 321.81,-470 RBB_3.2 C_BB2.1
NetC_decap1_2: C_decap1.2 U1.22 U3.5 | length 357.5
  Top Layer w10: U3.5 378.31,-464.69 C_decap1.2 420.31,-465 v2(470,-465)
  Bottom Layer w10: v2(470,-465) 470,-355 532.83,-292.17 U1.22
NetC_RF1_2: C_RF1.2 SW1.1 | length 53.3
  Top Layer w10: C_RF1.2@154.69,-60 C_RF1.2
  Top Layer w15: C_RF1.2 162.3,-62.61 SW1.1
NetC_RF2_2: C_RF2.2 SW1.3 | length 57.6
  Top Layer w10: C_RF2.2 C_RF2.2@151.52,-113.8
  Top Layer w15: C_RF2.2@151.52,-113.8 SW1.3
NetC_RF3_1: C_RF3.1 SW1.6 | length 52.8
  Top Layer w10: C_RF3.1@479.11,-113.8 C_RF3.1
  Top Layer w15: SW1.6 C_RF3.1@479.11,-113.8
NetC_RF4_1: C_RF4.1 SW2.3 | length 47.8
  Top Layer w10: C_RF4.1@638.8,-99.11 C_RF4.1
  Top Layer w15: C_RF4.1@638.8,-99.11 SW2.3
NetC_RF5_1: C_RF5.1 SW2.6 | length 52.6
  Top Layer w10: C_RF5.1@638.8,218.48 C_RF5.1@640.32,220
  Top Layer w15: SW2.6 C_RF5.1@638.8,218.48
NetC_RF6_1: C_RF6.1 Z1.1 Z2.1 | length 65.4
  Top Layer w10: Z1.1@550,-209.68 Z1.1@550.32,-210
  Top Layer w20: Z1.1@550.32,-210 C_RF6.1
NetC_RF6_2: C_RF6.2 SW3.3 | length 47.3
  Top Layer w15: C_RF6.2@654.69,-208.8 SW3.3
NetC_RF7_1: C_RF7.1 Z3.1 Z4.1 | length 65.4
  Top Layer w10: Z3.1@1069.68,-210 Z3.1
  Top Layer w20: C_RF7.1 Z3.1@1069.68,-210
NetC_RF7_2: C_RF7.2 SW3.6 | length 42.6
  Top Layer w15: SW3.6 964.43,-208.8 C_RF7.2@965.31,-209.69
NetC_RF8_1: C_RF8.1 Z5.2 Z6.2 | length 65.4
  Top Layer w10: Z5.2@724.68,320 Z5.2@725,319.68
  Top Layer w20: C_RF8.1 Z5.2@724.68,320
NetC_RF8_2: C_RF8.2 SW4.3 | length 47.8
  Top Layer w10: C_RF8.2@619.11,318.8 C_RF8.2
  Top Layer w15: SW4.3 C_RF8.2@619.11,318.8
NetC_RF9_1: C_RF9.1 Z7.2 Z8.2 | length 65.4
  Top Layer w10: C_RF9.1@270,319.68 C_RF9.1
  Top Layer w20: Z7.2 Z8.2 C_RF9.1@270,319.68
NetC_RF9_2: C_RF9.2 SW4.6 | length 42.8
  Top Layer w10: C_RF9.2 C_RF9.2@310.89,318.8
  Top Layer w15: C_RF9.2@310.89,318.8 SW4.6
NetCd5_2: Cd5.2 Cd6.2 Cd7.2 R2_gnd.2 R2_pwr.1 U1.66 U1.74 U1.87 | length 1054
  Bottom Layer w8: U1.74 R2_pwr.1@926.54,535 ; R2_gnd.2 956.54,460 1025,460 1085,400
  Bottom Layer w10: U1.66 769.06,479.06 Cd7.2@770,480 ; R2_gnd.2 R2_gnd.2@935,490 ; U1.87 1049.68,89.68 Cd5.2@1085,125
  Bottom Layer w15: Cd5.2@1085,125 1085,340 1085,400
  Bottom Layer w20: Cd7.2@770,480 770,505 800,535 R2_pwr.1@940,535
NetCd8_2: Cd8.2 Cd9.2 Cd10.2 Cd11.2 R1_gnd.2 R1_pwr.1 U1.18 U1.24 U1.39 U1.50 | length 1572.6
  Top Layer w10: Cd10.2 v2(480,130)
  Bottom Layer w10: Cd9.2 431.03,-205.31 459.47,-176.87 496.87,-176.87 500.88,-180.88 ; Cd11.2 380,337.01 U1.50 463.78,306.22 510.32,259.68 510.32,89.68 ; U1.39 480,89.68 ; v2(480,130) 480,89.68 ; U1.24 493.46,-188.3 500.88,-180.88 ; 565,-315 598.45,-281.55 598.89,-281.55 611.57,-268.87 U1.18 611.57,-135 ; 480,89.68 510.32,89.68 ; 500.88,-180.88 546.77,-135 611.57,-135 ; 510.32,89.68 611.57,-11.57 611.57,-135
  Bottom Layer w20: 520,-448.46 520,-455 565,-410 565,-315
  Bottom Layer w30: R1_gnd.2@520,-550 520,-455
NetCp1_1: Cp1.1 Lt1.2 | length 40.4
  Top Layer w15: Lt1.2 274.68,-200 Cp1.1
NetCp1_2: Cp1.2 D1.3 | length 70.7
  Top Layer w15: D1.3 275,-300 Cp1.2@275,-240
NetLED1_1: LED1.1 R10.2 | length 37.6
  Top Layer w15: R10.2 LED1.1
NetLED2_1: LED2.1 R11.2 | length 37.6
  Top Layer w15: R11.2 LED2.1
NetR3_1: R3.1 U1.54 | length 208.9
  Top Layer w10: v2(525,475) 565,515 R3.1
  Bottom Layer w10: v2(525,475) 525,416.7 530.06,411.65 530.06,371.99 U1.54
NetR_FB1_1: R_FB1.1 R_FB2.2 U4.4 | length 89.6
  Bottom Layer w6: R_FB2.2@932.09,707.4 R_FB2.2
  Bottom Layer w20: U4.4 R_FB2.2@932.09,707.4 ; R_FB1.1 R_FB2.2
NetR_FB3_1: R_FB3.1 R_FB4.2 U6.4 | length 84.6
  Bottom Layer w6: R_FB4.2@1202.09,702.4 R_FB4.2
  Bottom Layer w20: U6.4 R_FB4.2@1202.09,702.4 ; R_FB3.1 R_FB4.2
NetR_UP_1: R_UP.1 U1.27 U2.17 | length 829.2
  Top Layer w10: v11(730,235) 730.47,234.53 U2.17
  Power Plane w10: v8(331.54,-53.46) 331.54,56.73 509.81,235 v11(730,235)
  Bottom Layer w10: R_UP.1 329.68,-105.09 371.13,-146.54 U1.27
NetU1_23: U1.23 U3.1 | length 258.9
  Top Layer w10: v2(375,-345) 375.59,-345.59 U3.1
  Bottom Layer w10: v2(375,-345) 440,-345 513.15,-271.85 U1.23
NetU2_20: U2.20 U5.6 | length 855.4
  Top Layer w6: U2.20 783.66,175 v6(815,175) ; U5.6 1226.51,-336 1279.62,-336 v5(1280.62,-335)
  Power Plane w6: v6(815,175) 901.21,175 965,111.21 965,63.79 1170,-141.21 1170,-180 1265,-275 1275,-275 1290,-290 1290,-325.62 v5(1280.62,-335)
NetU2_21: U2.21 U5.7 | length 754.1
  Top Layer w6: U2.21 814.21,155.79 v6(815,155) ; U5.7 1255.62,-315 v5(1260.62,-320)
  Power Plane w6: v6(815,155) 845,155 915,85 926.82,85 1155,-143.18 1155,-215 1260,-320 v5(1260.62,-320)
NetU2_29: U2.29 U5.11 | length 449.9
  Top Layer w6: U2.29 890.47,49.53 v6(930,10) ; v6(1120,-180) 1175,-235 U5.11
  Power Plane w6: v6(930,10) v6(1120,-180)
NetU2_30: U2.30 U5.9 | length 473.2
  Top Layer w6: U2.30 910.16,49.84 930,30 v6(935,30) ; v6(1135,-150) 1215,-230 1215,-263.19 U5.9
  Power Plane w6: v6(935,30) 955,30 v6(1135,-150)
PLL_CLK2: Ext_Clock.2 U1.13 | length 550.1
  Bottom Layer w8: U1.13 710,-315 730,-335 995,-335 1070,-410 Ext_Clock.2@1070,-475
PLL_CLK3: Ext_Clock.4 U1.16 | length 707.8
  Bottom Layer w6: U1.16 650.94,-324.06 635,-340 635,-434.11 715.89,-515 1020,-515 Ext_Clock.4
RF_IN: ANT.1 C_RF1.1 SMA1.1 | length 208.8
  Top Layer w15: C_RF1.1 120.32,-49.68 150,-20
  Top Layer w25: 165,-5 SMA1.1
  Top Layer w44.3: ANT.1 C_RF1.1@115.32,-60 ; 150,-20 165,-5
RF_RX: C_RF2.1 Ct1.1 Lt1.1 | length 91.1
  Top Layer w10: Ct1.1 Ct1.1@150,-199.68
  Top Layer w15: Ct1.1 Lt1.1 ; Ct1.1@150,-199.68 C_RF2.1
RF_SWITCH1: C_RF4.2 SW3.1 | length 94.8
  Top Layer w15: C_RF4.2 657.93,-157.61 SW3.1@706.94,-157.61 ; SW3.1 SW3.1@722.39,-157.61
RF_SWITCH2: C_RF5.2 SW4.1 | length 76.7
  Top Layer w10: SW4.1 SW4.1@574.69,265.98
  Top Layer w15: SW4.1 622.07,267.61 C_RF5.2
RF_TX: C_RF3.2 SW2.1 | length 70.7
  Top Layer w44.3: C_RF3.2@525,-110 575,-60
RST: R12.1 SBW1.2 U2.23 | length 654.7
  Top Layer w10: U2.23 761.42,116.42 755,110 755,80 800,35 880,35 965,-50 1170,-50 1195,-75 SBW1.2
  Top Layer w15: SBW1.2 1234.68,-75 R12.1
RX/TX_A: SW1.4 U1.26 V_SW1.2 | length 365.8
  Top Layer w10: SW1.4@219.39,-139.39 250,-170 v2(330,-170) 360,-200 360,-265.07 385,-290.07 V_SW1.2
  Top Layer w15: SW1.4 SW1.4@219.39,-139.39
  Bottom Layer w10: v2(330,-170) 333.78,-166.22 U1.26
RX/TX_B: SW1.5 U1.28 V_SW1.3 | length 343.5
  Top Layer w10: SW1.5 428.06,-186.94 410,-205 410,-260 V_SW1.3@435,-285 ; SW1.5@428.98,-140.31 485.31,-140.31 v2(495,-150)
  Top Layer w15: SW1.5 SW1.5@428.98,-140.31 ; V_SW1.3 V_SW1.3@435,-285
  Bottom Layer w10: U1.28 471.85,-126.85 v2(495,-150)
  Bottom Layer w15: v2@491.54,-146.54 v2(495,-150)
SW2_A: SW2.4 U1.32 V_SW2.1 | length 918
  Top Layer w10: SW2.4 664.39,-25.61 v2(705,15)
  Power Plane w10: v2(480,-26.57) 521.57,15 v2(705,15)
  Bottom Layer w10: V_SW2.1 145,255 270,130 270,45 300,15 345,15 358.45,1.55 358.45,-35.43 368.35,-45.33 408.01,-45.33 U1.32 458.46,-48.11 v2(480,-26.57)
SW2_B: SW2.5 U1.43 V_SW2.2 | length 753.8
  Top Layer w10: SW2.5 v2(715,168.43)
  Power Plane w10: v2(480,168.43) v2(715,168.43)
  Bottom Layer w10: V_SW2.2 165,355 210,310 210,235 291,154 315.77,154 330.19,168.43 U1.43 v2(480,168.43)
SW3_A: SW3.4 U1.11 V_SW3.1 | length 717.7
  Top Layer w10: SW3.4 714.39,-234.39 v2@775,-295 ; v2(785,-305) 901,-421 1086,-421 1185,-520 V_SW3.1
  Bottom Layer w10: U1.11 749.37,-269.37 v2(785,-305)
SW3_B: SW3.5 U1.2 V_SW3.2 | length 506.7
  Top Layer w10: SW3.5 926.54,-237.87 v2(926.54,-300) 961.54,-335 1012.37,-335 1082.37,-405 1160,-405 V_SW3.2
  Bottom Layer w10: v2(926.54,-300) U1.2
SW4_A: SW4.4 U1.46 V_SW4.1 | length 513.7
  Top Layer w10: V_SW4.1 445,420 430,405 v2(430,395) 525,395 573,347 SW4.4
  Power Plane w10: v5(342.52,227.48) 342.52,307.52 v2(430,395)
  Bottom Layer w10: v5(342.52,227.48) U1.46
SW4_B: SW4.5 U1.45 V_SW4.2 | length 451.2
  Top Layer w10: 315,420 360,465 V_SW4.2
  Top Layer w15: 315,420 v2(315,380) 316.33,380 SW4.5
  Power Plane w10: v2(315,380) 315,220 v5(327.2,207.8)
  Bottom Layer w10: v5(327.2,207.8) U1.45
TB1: 1.1 U2.2 | length 666.7
  Top Layer w10: U2.2 1008.58,359.93 1030,381.34 1030,430 1085,485 1085,495 1160,570 1260,570 1.1@1455,375
TB2: 2.1 U2.1 | length 1072.5
  Top Layer w10: U2.1 1100.78,414.33 1100.78,480.78 1170,550 1253.44,550 1325,478.44 1325,115 1500,-60 2.1
TB3: 3.1 U2.35 | length 840.5
  Top Layer w10: U2.35 1008.58,41.42 v6(1020,30) ; v6(1353,-323) 1480,-450 3.1
  Power Plane w10: v6(1020,30) 1044,6 1233.93,6 1240.69,-0.76 1240.69,-210.69 v6@1350,-320
TEST: SBW1.3 U2.22 | length 660.6
  Top Layer w10: U2.22 746.1,136.1 735,125 735,75 795,15 877.37,15 962.37,-70 1155,-70 SBW1.3
VBAT: C8.1 C12.2 C13.2 U4.1 U4.3 U6.1 U6.3 V_Bat.1 | length 489.6
  Bottom Layer w6: C12.2 C12.2@742.28,707.4 ; U6.1@1060.04,630.31 U6.1
  Bottom Layer w20: C12.2 U4.3@785.47,709.69 ; C13.2 U6.1@1060.04,630.31 ; U6.1 1082.6,627.6 1115,660 1115,680 1092.6,702.4 U6.3 ; V_Bat.1@1394.88,680.12 V_Bat.1
  Bottom Layer w25: U4.3@785.47,709.69 815.31,709.69 835,690 835,662.5 805.1,632.6 U4.1 ; C8.1 V_Bat.1@1394.88,680.12
VCC_3.0: C1_CLK.1 C11.2 C14.2 R1_pwr.2 R2_pwr.2 R12.2 R_FB1.2 R_UP.2 SBW1.4 U2.37 U2.48 U4.5 XL1.4 | length 723.4
  Top Layer w10: U2.48@1055,315 1055,315.08 U2.48 ; 1085,85 v10(1100,100)
  Top Layer w15: U2.37@1050,95 1075,95 1085,85 1101.85,68.15 C11.2 ; U2.48@1055,315 1080,340 v2(1115,340) ; SBW1.4 1244.69,-175 R12.2
  Bottom Layer w6: U4.5 U4.5@885,629.84 ; R_FB1.2@932.28,632.6 R_FB1.2
  Bottom Layer w10: XL1.4@849.45,-410 XL1.4 ; C14.2 C14.2@885,584.69 ; R2_pwr.2 R2_pwr.2@1010,540
  Bottom Layer w15: v8(250,-10) R_UP.2 ; v2(585,-445) 585,-491.54 R1_pwr.2 ; v2(815,-410) XL1.4@849.45,-410 ; XL1.4 890.24,-409.68 C1_CLK.1
  Bottom Layer w20: C14.2@885,584.69 U4.5@885,629.84
  Bottom Layer w25: U4.5 R_FB1.2@932.28,632.6 ; R_FB1.2@935,630.31 v2(935,590) 970,590 993.46,566.54 R2_pwr.2
VCC_CORE: C15.2 Cd1.2 Cd2.2 Cd3.2 Cd4.2 FB1.1 R_FB3.2 U1.17 U1.37 U1.68 U1.89 U6.5 | length 677.3
  Top Layer w15: FB1.1 730,-15 v2(755,10)
  Bottom Layer w6: U6.5 U6.5@1160,624.84 ; R_FB3.2@1202.28,627.6 R_FB3.2
  Bottom Layer w8: Cd4.2@615,-340.31 v8(615,-310) 631.26,-293.74 U1.17 ; Cd3.2@1075,40.31 1075.31,40 v7(1115,40)
  Bottom Layer w10: v8(305,60) 317.5,47.5 328.46,36.54 336.22,36.54 Cd1.2 350,50.32 U1.37 ; U1.68 808.43,423.74 Cd2.2 ; Cd2.2@834.68,440 834.68,449.68 v2(860,475) ; U1.89 1065,50.32 Cd3.2@1075,40.31
  Bottom Layer w20: U6.5 R_FB3.2@1202.28,627.6 ; C15.2@1160,579.69 U6.5@1160,624.84
  Bottom Layer w25: R_FB3.2 1210,625.31 v8(1210,585)
VCC_JTAG: PRG_Header.7 U1.56 | length 398.4
  Bottom Layer w10: PRG_Header.7 475,555 595,555 610,540 610,460 572.2,422.2 U1.56
VCC_PUMP: PRG_Header.10 U1.52 | length 625.4
  Bottom Layer w10: U1.52 493.46,471.54 465,500 403.44,500 368.44,535 368.44,718.44 400,750 480,750 PRG_Header.10
pads on no net: PRG_Header.1 U1.3 U1.4 U1.5 U1.6 U1.7 U1.8 U1.10 U1.19 U1.20 U1.21 U1.29 U1.30 U1.31 U1.33 U1.34 U1.35 U1.36 U1.40 U1.41 U1.42 U1.44 U1.53 U1.57 U1.58 U1.59 U1.60 U1.61 U1.62 U1.63 U1.69 U1.71 U1.72 U1.73 U1.76 U1.77 U1.86 U1.90 U1.91 U1.92 U1.93 U1.94 U1.95 U1.96 U1.97 U1.98 U1.99 U1.100 U2.4 U2.5 U2.6 U2.8 U2.15 U2.16 U2.19 U2.27 U2.28 U2.33 U2.34 U2.38 U5.2 U5.3 U5.5 U5.10 U5.15

## Polygon pours and split planes (outlines as drawn)
GND on Bottom Layer "Bottom Layer-No Net" (solid, remove dead copper, pour order 2): 1700,539.78 1700,-690 1252.92,-690 1250,-690 1250,539.78 1700,539.78
VCC_3.0 on Bottom Layer "Bottom Layer-No Net" (solid, remove dead copper, pour order 2): 1250,609.47 1250,-700 222.25,-700 215.53,-700 215.53,609.47 1250,609.47
VBAT on Bottom Layer "Bottom Layer-No Net" (solid, remove dead copper, pour order 2): 1660,800 1660,615 676.43,615 670,615 670,800 1660,800
GND on GND Plane "Bottom Layer-No Net" (solid, remove dead copper, pour order 5): 1700,790.2 1700,530 1165,530 1165,791.08 1698.12,791.08 1700,790.2
GND on GND Plane "Bottom Layer-No Net" (solid, remove dead copper, pour order 5): 1300,794.93 1300,-700 45,-700 45,800 1295.58,800 1300,794.93
VCC_CORE on Power Plane "Bottom Layer-No Net" (solid, remove dead copper, pour order 5): 1310,794.93 1310,-700 205,-700 205,800 1306.11,800 1310,794.93
GND on Top Layer "Top-layer-GND" (hatched 90Degree grid 20 track 8, pour order 8): 1300,-629.94 1300.3,-628.96 1300.3,530 1700,530 1700,-626.04 1700,-633.83 1700,-637.72 1700,-649.4 1684.38,-700 1322.82,-700 1321.62,-700 1300,-629.94

## Keep-outs
Keep-Out Layer:
  the board outline again, w10

## Other copper
Top Layer:
  region net GND: 870,-160 870,-45 840,-45 840,-160
  region net GND: 625,-340 625,-260 505,-260 505,-340
  region net GND: 1110,-165 1110,-85 990,-85 990,-165
  region net GND: 770,375 770,455 650,455 650,375
  region net GND: 1080,-175 1080,-110 1025,-110 1025,-175
  region net NetC_BB1_2: 90,-310 90,-345 195,-345 195,-310
  region net GND: 90,-255 90,-290 195,-290 195,-255
  region net GND: 613.2,145 613.2,190 587.61,190 587.61,145
  region net GND: 670,0 670,115 580,115 580,0
  rectangle net GND: 900,-183.2 945,-157.61
  rectangle net GND: 755,-240 870,-150
  region net GND: 375,293.2 330,293.2 330,267.61 375,267.61
  region net GND: 520,350 405,350 405,260 520,260
  rectangle net GND: 260,-145 375,-55
  rectangle net GND: 405,-88.2 450,-62.61
  region net GND: 160,265 160,185 280,185 280,265
  region net GND: 195,290 195,225 250,225 250,290
  region net GND: 540,-240 540,-305 595,-305 595,-240
  region net GND: 740,350 740,415 685,415 685,350
  region net RF_RX: 149.68,-200 150.32,-200 150,-199.68

## Text inside footprints (layer, text, board x,y; h text height)
Ext_Clock: Top Overlay "1" at 960,-395 h20 r270; Top Overlay "2" at 1065,-390 h20 r270; Top Overlay "4" at 1070,-635 h20 r270; Top Overlay "3" at 965,-640 h20 r270
PRG_Header: Top Overlay "12" at 690,695 h20; Top Overlay "1" at 690,585 h20; Top Overlay "1" at 705,585 h20; Top Overlay "1" at 45,595 h20; Top Overlay "2" at 40,695 h20